# EAGLE board bridge-panelized (EAGLE 7.7.0)
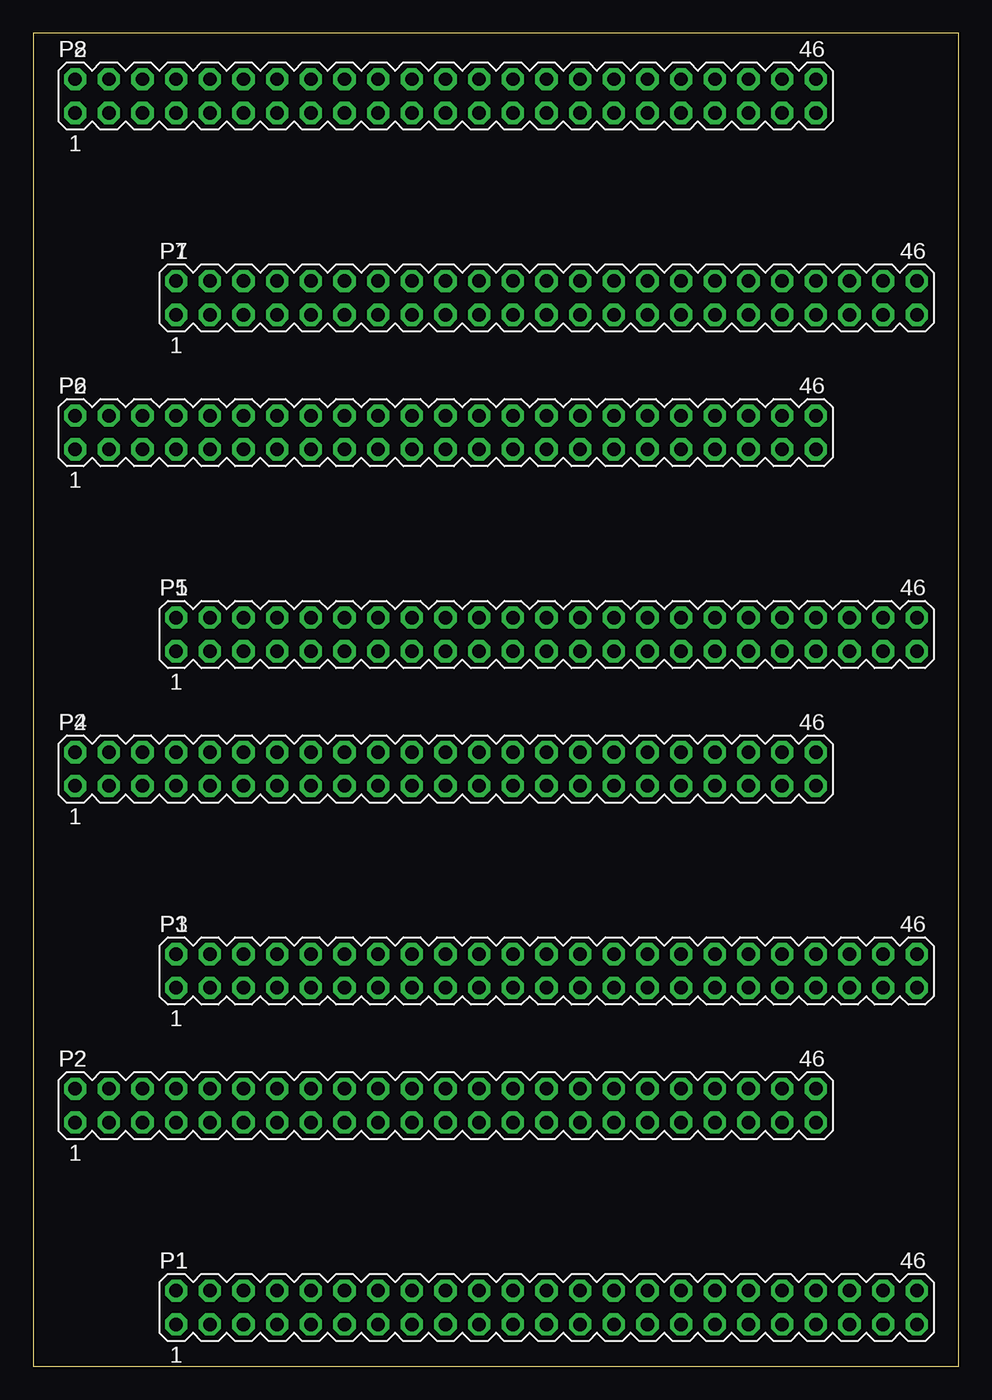
[diagram p0: board, top side]
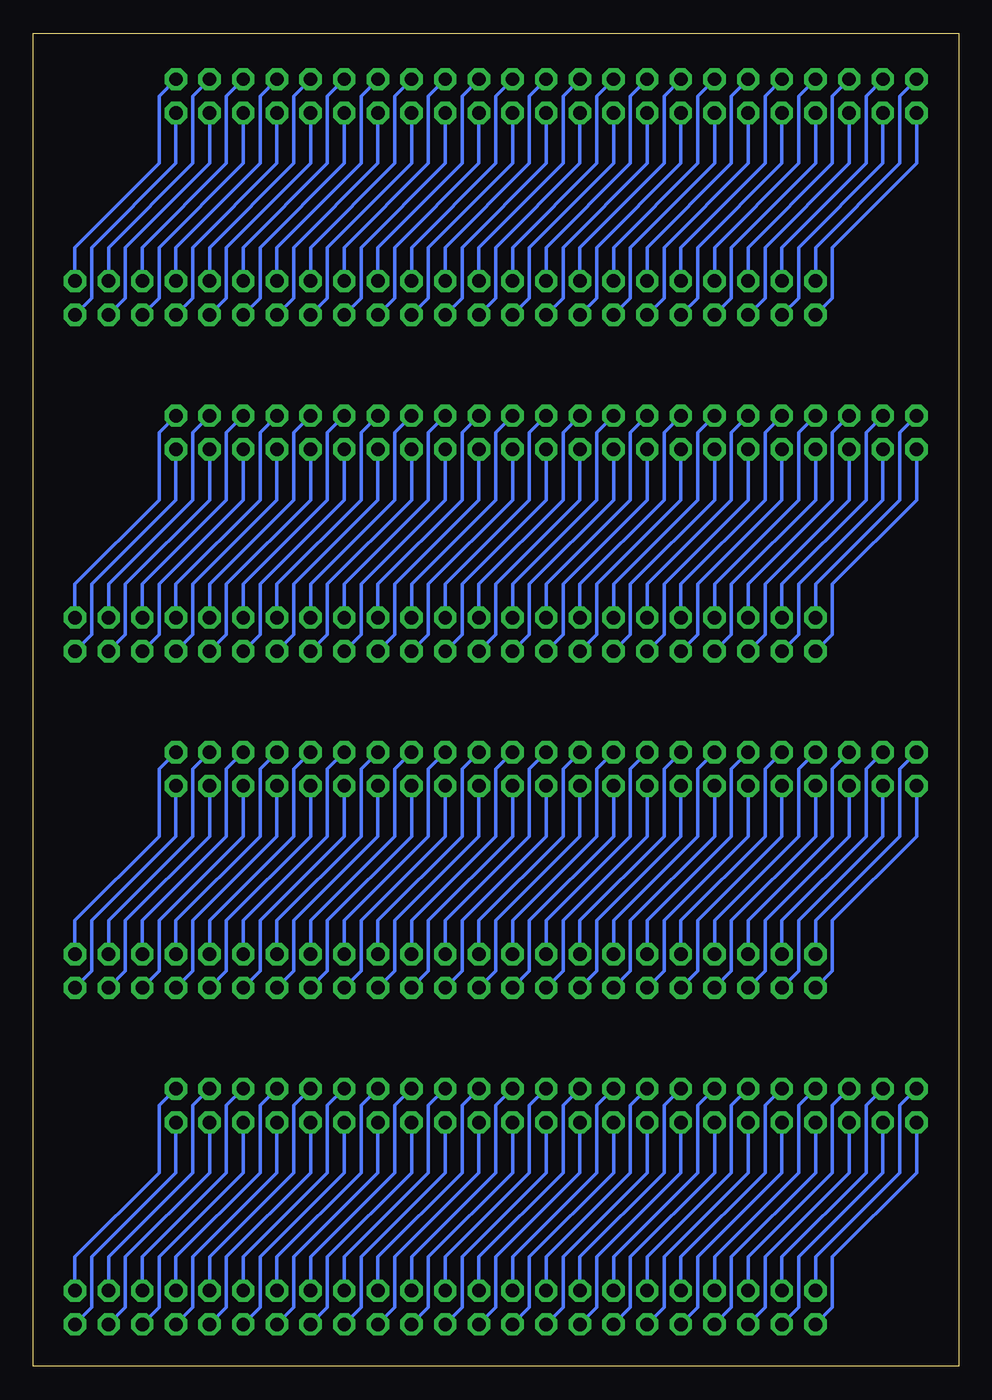
[diagram p1: board, bottom side, seen from below]

Size 69.83 x 100.64 mm. Coordinates in mm from the lower left corner, seen from the top.
Outline: 0,0 69.83,0 69.83,100.64 0,100.64 0,0
Copper layers (1*16): Top 0.035mm / dielectric 1.6mm / Bottom 0.035mm
Design rules "verysmall": minimum track width 10mil, minimum drill 31mil, track to track 9mil, track to pad 8mil, pad to pad 7mil, via to via 20mil, smd to smd 7mil, copper to edge 50mil, drill to drill 40mil, minimum pad ring 13mil, minimum via ring 13mil, stop-mask expansion 4mil, vias tented up to drill 0mil, thermal gap 10mil

## Footprints (pad centres in the part's own frame; a part is rotated, then mirrored left to right if it is on the bottom)
MA23-2 = drill 1.016 octagon: 1 -24.13,-1.27; 2 -24.13,1.27; 3 -21.59,-1.27; 4 -21.59,1.27; 5 -19.05,-1.27; 6 -19.05,1.27; 7 -16.51,-1.27; 8 -16.51,1.27; 9 -13.97,-1.27; 10 -13.97,1.27; 11 -11.43,-1.27; 12 -11.43,1.27; 13 -8.89,-1.27; 14 -8.89,1.27; 15 -6.35,-1.27; 16 -6.35,1.27; 17 -3.81,-1.27; 18 -3.81,1.27; 19 -1.27,-1.27; 20 -1.27,1.27; 21 1.27,-1.27; 22 1.27,1.27; 23 3.81,-1.27; 24 3.81,1.27; 25 6.35,-1.27; 26 6.35,1.27; 27 8.89,-1.27; 28 8.89,1.27; 29 11.43,-1.27; 30 11.43,1.27; 31 13.97,-1.27; 32 13.97,1.27; 33 16.51,-1.27; 34 16.51,1.27; 35 19.05,-1.27; 36 19.05,1.27; 37 21.59,-1.27; 38 21.59,1.27; 39 24.13,-1.27; 40 24.13,1.27; 41 26.67,-1.27; 42 26.67,1.27; 43 29.21,-1.27; 44 29.21,1.27; 45 31.75,-1.27; 46 31.75,1.27

## Placement (x,y rotation side)
P1  HEADERS23-2  [MA23-2]  34.92,4.45 0 top
P2  HEADERS23-2  [MA23-2]  27.3,19.68 0 top
P3  HEADERS23-2  [MA23-2]  34.92,29.84 0 top
P4  HEADERS23-2  [MA23-2]  27.3,45.09 0 top
P5  HEADERS23-2  [MA23-2]  34.92,55.24 0 top
P6  HEADERS23-2  [MA23-2]  27.3,70.48 0 top
P7  HEADERS23-2  [MA23-2]  34.92,80.64 0 top
P8  HEADERS23-2  [MA23-2]  27.3,95.89 0 top

## Library data of the parts
P1-P8 = 0000halfgaar

## Nets
N$1: P1.1 P2.1
N$2: P1.3 P2.3
N$3: P1.5 P2.5
N$4: P1.7 P2.7
N$5: P1.9 P2.9
N$6: P1.11 P2.11
N$7: P1.13 P2.13
N$8: P1.15 P2.15
N$9: P1.17 P2.17
N$10: P1.19 P2.19
N$11: P1.21 P2.21
N$12: P1.23 P2.23
N$13: P1.25 P2.25
N$14: P1.27 P2.27
N$15: P1.29 P2.29
N$16: P1.31 P2.31
N$17: P1.33 P2.33
N$18: P1.35 P2.35
N$19: P1.37 P2.37
N$20: P1.39 P2.39
N$21: P1.41 P2.41
N$22: P1.43 P2.43
N$23: P1.45 P2.45
N$24: P1.2 P2.2
N$25: P1.4 P2.4
N$26: P1.6 P2.6
N$27: P1.8 P2.8
N$28: P1.10 P2.10
N$29: P1.12 P2.12
N$30: P1.14 P2.14
N$31: P1.16 P2.16
N$32: P1.18 P2.18
N$33: P1.20 P2.20
N$34: P1.22 P2.22
N$35: P1.24 P2.24
N$36: P1.26 P2.26
N$37: P1.28 P2.28
N$38: P1.30 P2.30
N$39: P1.32 P2.32
N$40: P1.34 P2.34
N$41: P1.36 P2.36
N$42: P1.38 P2.38
N$43: P1.40 P2.40
N$44: P1.42 P2.42
N$45: P1.44 P2.44
N$46: P1.46 P2.46
N$47: P3.1 P4.1
N$48: P3.3 P4.3
N$49: P3.5 P4.5
N$50: P3.7 P4.7
N$51: P3.9 P4.9
N$52: P3.11 P4.11
N$53: P3.13 P4.13
N$54: P3.15 P4.15
N$55: P3.17 P4.17
N$56: P3.19 P4.19
N$57: P3.21 P4.21
N$58: P3.23 P4.23
N$59: P3.25 P4.25
N$60: P3.27 P4.27
N$61: P3.29 P4.29
N$62: P3.31 P4.31
N$63: P3.33 P4.33
N$64: P3.35 P4.35
N$65: P3.37 P4.37
N$66: P3.39 P4.39
N$67: P3.41 P4.41
N$68: P3.43 P4.43
N$69: P3.45 P4.45
N$70: P3.2 P4.2
N$71: P3.4 P4.4
N$72: P3.6 P4.6
N$73: P3.8 P4.8
N$74: P3.10 P4.10
N$75: P3.12 P4.12
N$76: P3.14 P4.14
N$77: P3.16 P4.16
N$78: P3.18 P4.18
N$79: P3.20 P4.20
N$80: P3.22 P4.22
N$81: P3.24 P4.24
N$82: P3.26 P4.26
N$83: P3.28 P4.28
N$84: P3.30 P4.30
N$85: P3.32 P4.32
N$86: P3.34 P4.34
N$87: P3.36 P4.36
N$88: P3.38 P4.38
N$89: P3.40 P4.40
N$90: P3.42 P4.42
N$91: P3.44 P4.44
N$92: P3.46 P4.46
N$93: P5.1 P6.1
N$94: P5.3 P6.3
N$95: P5.5 P6.5
N$96: P5.7 P6.7
N$97: P5.9 P6.9
N$98: P5.11 P6.11
N$99: P5.13 P6.13
N$100: P5.15 P6.15
N$101: P5.17 P6.17
N$102: P5.19 P6.19
N$103: P5.21 P6.21
N$104: P5.23 P6.23
N$105: P5.25 P6.25
N$106: P5.27 P6.27
N$107: P5.29 P6.29
N$108: P5.31 P6.31
N$109: P5.33 P6.33
N$110: P5.35 P6.35
N$111: P5.37 P6.37
N$112: P5.39 P6.39
N$113: P5.41 P6.41
N$114: P5.43 P6.43
N$115: P5.45 P6.45
N$116: P5.2 P6.2
N$117: P5.4 P6.4
N$118: P5.6 P6.6
N$119: P5.8 P6.8
N$120: P5.10 P6.10
N$121: P5.12 P6.12
N$122: P5.14 P6.14
N$123: P5.16 P6.16
N$124: P5.18 P6.18
N$125: P5.20 P6.20
N$126: P5.22 P6.22
N$127: P5.24 P6.24
N$128: P5.26 P6.26
N$129: P5.28 P6.28
N$130: P5.30 P6.30
N$131: P5.32 P6.32
N$132: P5.34 P6.34
N$133: P5.36 P6.36
N$134: P5.38 P6.38
N$135: P5.40 P6.40
N$136: P5.42 P6.42
N$137: P5.44 P6.44
N$138: P5.46 P6.46
N$139: P7.1 P8.1
N$140: P7.3 P8.3
N$141: P7.5 P8.5
N$142: P7.7 P8.7
N$143: P7.9 P8.9
N$144: P7.11 P8.11
N$145: P7.13 P8.13
N$146: P7.15 P8.15
N$147: P7.17 P8.17
N$148: P7.19 P8.19
N$149: P7.21 P8.21
N$150: P7.23 P8.23
N$151: P7.25 P8.25
N$152: P7.27 P8.27
N$153: P7.29 P8.29
N$154: P7.31 P8.31
N$155: P7.33 P8.33
N$156: P7.35 P8.35
N$157: P7.37 P8.37
N$158: P7.39 P8.39
N$159: P7.41 P8.41
N$160: P7.43 P8.43
N$161: P7.45 P8.45
N$162: P7.2 P8.2
N$163: P7.4 P8.4
N$164: P7.6 P8.6
N$165: P7.8 P8.8
N$166: P7.10 P8.10
N$167: P7.12 P8.12
N$168: P7.14 P8.14
N$169: P7.16 P8.16
N$170: P7.18 P8.18
N$171: P7.20 P8.20
N$172: P7.22 P8.22
N$173: P7.24 P8.24
N$174: P7.26 P8.26
N$175: P7.28 P8.28
N$176: P7.30 P8.30
N$177: P7.32 P8.32
N$178: P7.34 P8.34
N$179: P7.36 P8.36
N$180: P7.38 P8.38
N$181: P7.40 P8.40
N$182: P7.42 P8.42
N$183: P7.44 P8.44
N$184: P7.46 P8.46

## Tracks (layer width: path | path; a pad name or v marks a point on that pad's centre or on a via)
N$1
  Bottom 0.254: P1.1 9.53,4.45 9.53,8.26 3.17,14.61 P2.1
N$2
  Bottom 0.254: P1.3 12.06,4.45 12.06,8.26 5.71,14.61 P2.3
N$3
  Bottom 0.254: P2.5 8.26,14.61 14.61,8.26 14.61,4.45 P1.5
N$4
  Bottom 0.254: P2.7 10.79,14.61 17.14,8.26 17.14,4.45 P1.7
N$5
  Bottom 0.254: P2.9 13.34,14.61 19.68,8.26 19.68,4.45 P1.9
N$6
  Bottom 0.254: P2.11 15.88,14.61 22.23,8.26 22.23,4.45 P1.11
N$7
  Bottom 0.254: P1.13 24.77,4.45 24.77,8.26 18.41,14.61 P2.13
N$8
  Bottom 0.254: P1.15 27.3,4.45 27.3,8.26 20.95,14.61 P2.15
N$9
  Bottom 0.254: P1.17 29.84,4.45 29.84,8.26 23.5,14.61 P2.17
N$10
  Bottom 0.254: P1.19 32.38,4.45 32.38,8.26 26.04,14.61 P2.19
N$11
  Bottom 0.254: P1.21 34.92,4.45 34.92,8.26 28.57,14.61 P2.21
N$12
  Bottom 0.254: P1.23 37.47,4.45 37.47,8.26 31.11,14.61 P2.23
N$13
  Bottom 0.254: P1.25 40.01,4.45 40.01,8.26 33.66,14.61 P2.25
N$14
  Bottom 0.254: P1.27 42.55,4.45 42.55,8.26 36.2,14.61 P2.27
N$15
  Bottom 0.254: P1.29 45.09,4.45 45.09,8.26 38.73,14.61 P2.29
N$16
  Bottom 0.254: P1.31 47.62,4.45 47.62,8.26 41.27,14.61 P2.31
N$17
  Bottom 0.254: P1.33 50.16,4.45 50.16,8.26 43.81,14.61 P2.33
N$18
  Bottom 0.254: P1.35 52.7,4.45 52.7,8.26 46.35,14.61 P2.35
N$19
  Bottom 0.254: P1.37 55.24,4.45 55.24,8.26 48.9,14.61 P2.37
N$20
  Bottom 0.254: P1.39 57.78,4.45 57.78,8.26 51.44,14.61 P2.39
N$21
  Bottom 0.254: P1.41 60.33,4.45 60.33,8.26 53.98,14.61 P2.41
N$22
  Bottom 0.254: P1.43 62.87,4.45 62.87,8.26 56.52,14.61 P2.43
N$23
  Bottom 0.254: P1.45 65.41,4.45 65.41,8.26 59.05,14.61 P2.45
N$24
  Bottom 0.254: P2.2 4.45,19.68 4.45,14.61 10.79,8.26 P1.2
N$25
  Bottom 0.254: P2.4 6.99,19.68 6.99,14.61 13.34,8.26 P1.4
N$26
  Bottom 0.254: P2.6 9.53,19.68 9.53,14.61 15.88,8.26 P1.6
N$27
  Bottom 0.254: P2.8 12.06,19.68 12.06,14.61 18.41,8.26 P1.8
N$28
  Bottom 0.254: P2.10 14.61,19.68 14.61,14.61 20.95,8.26 P1.10
N$29
  Bottom 0.254: P2.12 17.14,19.68 17.14,14.61 23.5,8.26 P1.12
N$30
  Bottom 0.254: P2.14 19.68,19.68 19.68,14.61 26.04,8.26 P1.14
N$31
  Bottom 0.254: P2.16 22.23,19.68 22.23,14.61 28.57,8.26 P1.16
N$32
  Bottom 0.254: P2.18 24.77,19.68 24.77,14.61 31.11,8.26 P1.18
N$33
  Bottom 0.254: P2.20 27.3,19.68 27.3,14.61 33.66,8.26 P1.20
N$34
  Bottom 0.254: P2.22 29.84,19.68 29.84,14.61 36.2,8.26 P1.22
N$35
  Bottom 0.254: P2.24 32.38,19.68 32.38,14.61 38.73,8.26 P1.24
N$36
  Bottom 0.254: P2.26 34.92,19.68 34.92,14.61 41.27,8.26 P1.26
N$37
  Bottom 0.254: P2.28 37.47,19.68 37.47,14.61 43.81,8.26 P1.28
N$38
  Bottom 0.254: P2.30 40.01,19.68 40.01,14.61 46.35,8.26 P1.30
N$39
  Bottom 0.254: P2.32 42.55,19.68 42.55,14.61 48.9,8.26 P1.32
N$40
  Bottom 0.254: P2.34 45.09,19.68 45.09,14.61 51.44,8.26 P1.34
N$41
  Bottom 0.254: P2.36 47.62,19.68 47.62,14.61 53.98,8.26 P1.36
N$42
  Bottom 0.254: P2.38 50.16,19.68 50.16,14.61 56.52,8.26 P1.38
N$43
  Bottom 0.254: P2.40 52.7,19.68 52.7,14.61 59.05,8.26 P1.40
N$44
  Bottom 0.254: P2.42 55.24,19.68 55.24,14.61 61.59,8.26 P1.42
N$45
  Bottom 0.254: P2.44 57.78,19.68 57.78,14.61 64.14,8.26 P1.44
N$46
  Bottom 0.254: P2.46 60.33,19.68 60.33,14.61 66.67,8.26 P1.46
N$47
  Bottom 0.254: P3.1 9.53,29.84 9.53,33.66 3.17,40.01 P4.1
N$48
  Bottom 0.254: P3.3 12.06,29.84 12.06,33.66 5.71,40.01 P4.3
N$49
  Bottom 0.254: P4.5 8.26,40.01 14.61,33.66 14.61,29.84 P3.5
N$50
  Bottom 0.254: P4.7 10.79,40.01 17.14,33.66 17.14,29.84 P3.7
N$51
  Bottom 0.254: P4.9 13.34,40.01 19.68,33.66 19.68,29.84 P3.9
N$52
  Bottom 0.254: P4.11 15.88,40.01 22.23,33.66 22.23,29.84 P3.11
N$53
  Bottom 0.254: P3.13 24.77,29.84 24.77,33.66 18.41,40.01 P4.13
N$54
  Bottom 0.254: P3.15 27.3,29.84 27.3,33.66 20.95,40.01 P4.15
N$55
  Bottom 0.254: P3.17 29.84,29.84 29.84,33.66 23.5,40.01 P4.17
N$56
  Bottom 0.254: P3.19 32.38,29.84 32.38,33.66 26.04,40.01 P4.19
N$57
  Bottom 0.254: P3.21 34.92,29.84 34.92,33.66 28.57,40.01 P4.21
N$58
  Bottom 0.254: P3.23 37.47,29.84 37.47,33.66 31.11,40.01 P4.23
N$59
  Bottom 0.254: P3.25 40.01,29.84 40.01,33.66 33.66,40.01 P4.25
N$60
  Bottom 0.254: P3.27 42.55,29.84 42.55,33.66 36.2,40.01 P4.27
N$61
  Bottom 0.254: P3.29 45.09,29.84 45.09,33.66 38.73,40.01 P4.29
N$62
  Bottom 0.254: P3.31 47.62,29.84 47.62,33.66 41.27,40.01 P4.31
N$63
  Bottom 0.254: P3.33 50.16,29.84 50.16,33.66 43.81,40.01 P4.33
N$64
  Bottom 0.254: P3.35 52.7,29.84 52.7,33.66 46.35,40.01 P4.35
N$65
  Bottom 0.254: P3.37 55.24,29.84 55.24,33.66 48.9,40.01 P4.37
N$66
  Bottom 0.254: P3.39 57.78,29.84 57.78,33.66 51.44,40.01 P4.39
N$67
  Bottom 0.254: P3.41 60.33,29.84 60.33,33.66 53.98,40.01 P4.41
N$68
  Bottom 0.254: P3.43 62.87,29.84 62.87,33.66 56.52,40.01 P4.43
N$69
  Bottom 0.254: P3.45 65.41,29.84 65.41,33.66 59.05,40.01 P4.45
N$70
  Bottom 0.254: P4.2 4.45,45.09 4.45,40.01 10.79,33.66 P3.2
N$71
  Bottom 0.254: P4.4 6.99,45.09 6.99,40.01 13.34,33.66 P3.4
N$72
  Bottom 0.254: P4.6 9.53,45.09 9.53,40.01 15.88,33.66 P3.6
N$73
  Bottom 0.254: P4.8 12.06,45.09 12.06,40.01 18.41,33.66 P3.8
N$74
  Bottom 0.254: P4.10 14.61,45.09 14.61,40.01 20.95,33.66 P3.10
N$75
  Bottom 0.254: P4.12 17.14,45.09 17.14,40.01 23.5,33.66 P3.12
N$76
  Bottom 0.254: P4.14 19.68,45.09 19.68,40.01 26.04,33.66 P3.14
N$77
  Bottom 0.254: P4.16 22.23,45.09 22.23,40.01 28.57,33.66 P3.16
N$78
  Bottom 0.254: P4.18 24.77,45.09 24.77,40.01 31.11,33.66 P3.18
N$79
  Bottom 0.254: P4.20 27.3,45.09 27.3,40.01 33.66,33.66 P3.20
N$80
  Bottom 0.254: P4.22 29.84,45.09 29.84,40.01 36.2,33.66 P3.22
N$81
  Bottom 0.254: P4.24 32.38,45.09 32.38,40.01 38.73,33.66 P3.24
N$82
  Bottom 0.254: P4.26 34.92,45.09 34.92,40.01 41.27,33.66 P3.26
N$83
  Bottom 0.254: P4.28 37.47,45.09 37.47,40.01 43.81,33.66 P3.28
N$84
  Bottom 0.254: P4.30 40.01,45.09 40.01,40.01 46.35,33.66 P3.30
N$85
  Bottom 0.254: P4.32 42.55,45.09 42.55,40.01 48.9,33.66 P3.32
N$86
  Bottom 0.254: P4.34 45.09,45.09 45.09,40.01 51.44,33.66 P3.34
N$87
  Bottom 0.254: P4.36 47.62,45.09 47.62,40.01 53.98,33.66 P3.36
N$88
  Bottom 0.254: P4.38 50.16,45.09 50.16,40.01 56.52,33.66 P3.38
N$89
  Bottom 0.254: P4.40 52.7,45.09 52.7,40.01 59.05,33.66 P3.40
N$90
  Bottom 0.254: P4.42 55.24,45.09 55.24,40.01 61.59,33.66 P3.42
N$91
  Bottom 0.254: P4.44 57.78,45.09 57.78,40.01 64.14,33.66 P3.44
N$92
  Bottom 0.254: P4.46 60.33,45.09 60.33,40.01 66.67,33.66 P3.46
N$93
  Bottom 0.254: P5.1 9.53,55.24 9.53,59.05 3.17,65.41 P6.1
N$94
  Bottom 0.254: P5.3 12.06,55.24 12.06,59.05 5.71,65.41 P6.3
N$95
  Bottom 0.254: P6.5 8.26,65.41 14.61,59.05 14.61,55.24 P5.5
N$96
  Bottom 0.254: P6.7 10.79,65.41 17.14,59.05 17.14,55.24 P5.7
N$97
  Bottom 0.254: P6.9 13.34,65.41 19.68,59.05 19.68,55.24 P5.9
N$98
  Bottom 0.254: P6.11 15.88,65.41 22.23,59.05 22.23,55.24 P5.11
N$99
  Bottom 0.254: P5.13 24.77,55.24 24.77,59.05 18.41,65.41 P6.13
N$100
  Bottom 0.254: P5.15 27.3,55.24 27.3,59.05 20.95,65.41 P6.15
N$101
  Bottom 0.254: P5.17 29.84,55.24 29.84,59.05 23.5,65.41 P6.17
N$102
  Bottom 0.254: P5.19 32.38,55.24 32.38,59.05 26.04,65.41 P6.19
N$103
  Bottom 0.254: P5.21 34.92,55.24 34.92,59.05 28.57,65.41 P6.21
N$104
  Bottom 0.254: P5.23 37.47,55.24 37.47,59.05 31.11,65.41 P6.23
N$105
  Bottom 0.254: P5.25 40.01,55.24 40.01,59.05 33.66,65.41 P6.25
N$106
  Bottom 0.254: P5.27 42.55,55.24 42.55,59.05 36.2,65.41 P6.27
N$107
  Bottom 0.254: P5.29 45.09,55.24 45.09,59.05 38.73,65.41 P6.29
N$108
  Bottom 0.254: P5.31 47.62,55.24 47.62,59.05 41.27,65.41 P6.31
N$109
  Bottom 0.254: P5.33 50.16,55.24 50.16,59.05 43.81,65.41 P6.33
N$110
  Bottom 0.254: P5.35 52.7,55.24 52.7,59.05 46.35,65.41 P6.35
N$111
  Bottom 0.254: P5.37 55.24,55.24 55.24,59.05 48.9,65.41 P6.37
N$112
  Bottom 0.254: P5.39 57.78,55.24 57.78,59.05 51.44,65.41 P6.39
N$113
  Bottom 0.254: P5.41 60.33,55.24 60.33,59.05 53.98,65.41 P6.41
N$114
  Bottom 0.254: P5.43 62.87,55.24 62.87,59.05 56.52,65.41 P6.43
N$115
  Bottom 0.254: P5.45 65.41,55.24 65.41,59.05 59.05,65.41 P6.45
N$116
  Bottom 0.254: P6.2 4.45,70.48 4.45,65.41 10.79,59.05 P5.2
N$117
  Bottom 0.254: P6.4 6.99,70.48 6.99,65.41 13.34,59.05 P5.4
N$118
  Bottom 0.254: P6.6 9.53,70.48 9.53,65.41 15.88,59.05 P5.6
N$119
  Bottom 0.254: P6.8 12.06,70.48 12.06,65.41 18.41,59.05 P5.8
N$120
  Bottom 0.254: P6.10 14.61,70.48 14.61,65.41 20.95,59.05 P5.10
N$121
  Bottom 0.254: P6.12 17.14,70.48 17.14,65.41 23.5,59.05 P5.12
N$122
  Bottom 0.254: P6.14 19.68,70.48 19.68,65.41 26.04,59.05 P5.14
N$123
  Bottom 0.254: P6.16 22.23,70.48 22.23,65.41 28.57,59.05 P5.16
N$124
  Bottom 0.254: P6.18 24.77,70.48 24.77,65.41 31.11,59.05 P5.18
N$125
  Bottom 0.254: P6.20 27.3,70.48 27.3,65.41 33.66,59.05 P5.20
N$126
  Bottom 0.254: P6.22 29.84,70.48 29.84,65.41 36.2,59.05 P5.22
N$127
  Bottom 0.254: P6.24 32.38,70.48 32.38,65.41 38.73,59.05 P5.24
N$128
  Bottom 0.254: P6.26 34.92,70.48 34.92,65.41 41.27,59.05 P5.26
N$129
  Bottom 0.254: P6.28 37.47,70.48 37.47,65.41 43.81,59.05 P5.28
N$130
  Bottom 0.254: P6.30 40.01,70.48 40.01,65.41 46.35,59.05 P5.30
N$131
  Bottom 0.254: P6.32 42.55,70.48 42.55,65.41 48.9,59.05 P5.32
N$132
  Bottom 0.254: P6.34 45.09,70.48 45.09,65.41 51.44,59.05 P5.34
N$133
  Bottom 0.254: P6.36 47.62,70.48 47.62,65.41 53.98,59.05 P5.36
N$134
  Bottom 0.254: P6.38 50.16,70.48 50.16,65.41 56.52,59.05 P5.38
N$135
  Bottom 0.254: P6.40 52.7,70.48 52.7,65.41 59.05,59.05 P5.40
N$136
  Bottom 0.254: P6.42 55.24,70.48 55.24,65.41 61.59,59.05 P5.42
N$137
  Bottom 0.254: P6.44 57.78,70.48 57.78,65.41 64.14,59.05 P5.44
N$138
  Bottom 0.254: P6.46 60.33,70.48 60.33,65.41 66.67,59.05 P5.46
N$139
  Bottom 0.254: P7.1 9.53,80.64 9.53,84.45 3.17,90.81 P8.1
N$140
  Bottom 0.254: P7.3 12.06,80.64 12.06,84.45 5.71,90.81 P8.3
N$141
  Bottom 0.254: P8.5 8.26,90.81 14.61,84.45 14.61,80.64 P7.5
N$142
  Bottom 0.254: P8.7 10.79,90.81 17.14,84.45 17.14,80.64 P7.7
N$143
  Bottom 0.254: P8.9 13.34,90.81 19.68,84.45 19.68,80.64 P7.9
N$144
  Bottom 0.254: P8.11 15.88,90.81 22.23,84.45 22.23,80.64 P7.11
N$145
  Bottom 0.254: P7.13 24.77,80.64 24.77,84.45 18.41,90.81 P8.13
N$146
  Bottom 0.254: P7.15 27.3,80.64 27.3,84.45 20.95,90.81 P8.15
N$147
  Bottom 0.254: P7.17 29.84,80.64 29.84,84.45 23.5,90.81 P8.17
N$148
  Bottom 0.254: P7.19 32.38,80.64 32.38,84.45 26.04,90.81 P8.19
N$149
  Bottom 0.254: P7.21 34.92,80.64 34.92,84.45 28.57,90.81 P8.21
N$150
  Bottom 0.254: P7.23 37.47,80.64 37.47,84.45 31.11,90.81 P8.23
N$151
  Bottom 0.254: P7.25 40.01,80.64 40.01,84.45 33.66,90.81 P8.25
N$152
  Bottom 0.254: P7.27 42.55,80.64 42.55,84.45 36.2,90.81 P8.27
N$153
  Bottom 0.254: P7.29 45.09,80.64 45.09,84.45 38.73,90.81 P8.29
N$154
  Bottom 0.254: P7.31 47.62,80.64 47.62,84.45 41.27,90.81 P8.31
N$155
  Bottom 0.254: P7.33 50.16,80.64 50.16,84.45 43.81,90.81 P8.33
N$156
  Bottom 0.254: P7.35 52.7,80.64 52.7,84.45 46.35,90.81 P8.35
N$157
  Bottom 0.254: P7.37 55.24,80.64 55.24,84.45 48.9,90.81 P8.37
N$158
  Bottom 0.254: P7.39 57.78,80.64 57.78,84.45 51.44,90.81 P8.39
N$159
  Bottom 0.254: P7.41 60.33,80.64 60.33,84.45 53.98,90.81 P8.41
N$160
  Bottom 0.254: P7.43 62.87,80.64 62.87,84.45 56.52,90.81 P8.43
N$161
  Bottom 0.254: P7.45 65.41,80.64 65.41,84.45 59.05,90.81 P8.45
N$162
  Bottom 0.254: P8.2 4.45,95.89 4.45,90.81 10.79,84.45 P7.2
N$163
  Bottom 0.254: P8.4 6.99,95.89 6.99,90.81 13.34,84.45 P7.4
N$164
  Bottom 0.254: P8.6 9.53,95.89 9.53,90.81 15.88,84.45 P7.6
N$165
  Bottom 0.254: P8.8 12.06,95.89 12.06,90.81 18.41,84.45 P7.8
N$166
  Bottom 0.254: P8.10 14.61,95.89 14.61,90.81 20.95,84.45 P7.10
N$167
  Bottom 0.254: P8.12 17.14,95.89 17.14,90.81 23.5,84.45 P7.12
N$168
  Bottom 0.254: P8.14 19.68,95.89 19.68,90.81 26.04,84.45 P7.14
N$169
  Bottom 0.254: P8.16 22.23,95.89 22.23,90.81 28.57,84.45 P7.16
N$170
  Bottom 0.254: P8.18 24.77,95.89 24.77,90.81 31.11,84.45 P7.18
N$171
  Bottom 0.254: P8.20 27.3,95.89 27.3,90.81 33.66,84.45 P7.20
N$172
  Bottom 0.254: P8.22 29.84,95.89 29.84,90.81 36.2,84.45 P7.22
N$173
  Bottom 0.254: P8.24 32.38,95.89 32.38,90.81 38.73,84.45 P7.24
N$174
  Bottom 0.254: P8.26 34.92,95.89 34.92,90.81 41.27,84.45 P7.26
N$175
  Bottom 0.254: P8.28 37.47,95.89 37.47,90.81 43.81,84.45 P7.28
N$176
  Bottom 0.254: P8.30 40.01,95.89 40.01,90.81 46.35,84.45 P7.30
N$177
  Bottom 0.254: P8.32 42.55,95.89 42.55,90.81 48.9,84.45 P7.32
N$178
  Bottom 0.254: P8.34 45.09,95.89 45.09,90.81 51.44,84.45 P7.34
N$179
  Bottom 0.254: P8.36 47.62,95.89 47.62,90.81 53.98,84.45 P7.36
N$180
  Bottom 0.254: P8.38 50.16,95.89 50.16,90.81 56.52,84.45 P7.38
N$181
  Bottom 0.254: P8.40 52.7,95.89 52.7,90.81 59.05,84.45 P7.40
N$182
  Bottom 0.254: P8.42 55.24,95.89 55.24,90.81 61.59,84.45 P7.42
N$183
  Bottom 0.254: P8.44 57.78,95.89 57.78,90.81 64.14,84.45 P7.44
N$184
  Bottom 0.254: P8.46 60.33,95.89 60.33,90.81 66.67,84.45 P7.46

## Text on the board
_tNames: P2 | P1 | P2 | P1 | P2 | P1 | P2 | P1